# Altium PCB ThrusterBoardOld.PcbDoc
Units mil, origin at the board's own origin, x right, y up, seen from the top; angles counter-clockwise.
Board outline 6500 x 2830 mil, 2 copper layers (Top Layer, Bottom Layer); 54 components, 65 nets, 277 pads, 83 vias.
Unrouted connection lines stored in the file: 8.
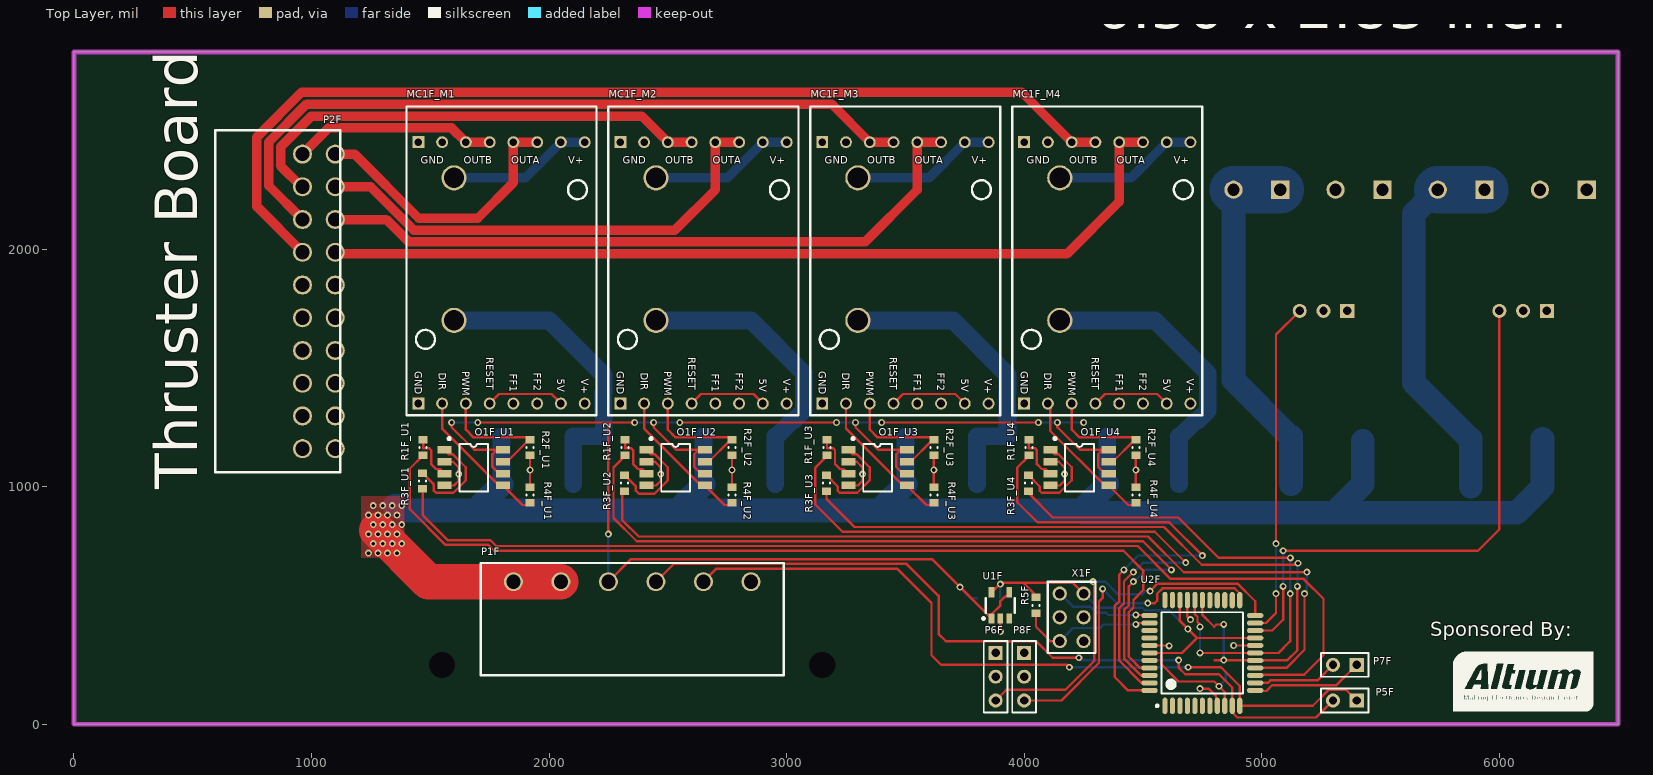
[diagram p0: Top Layer view]
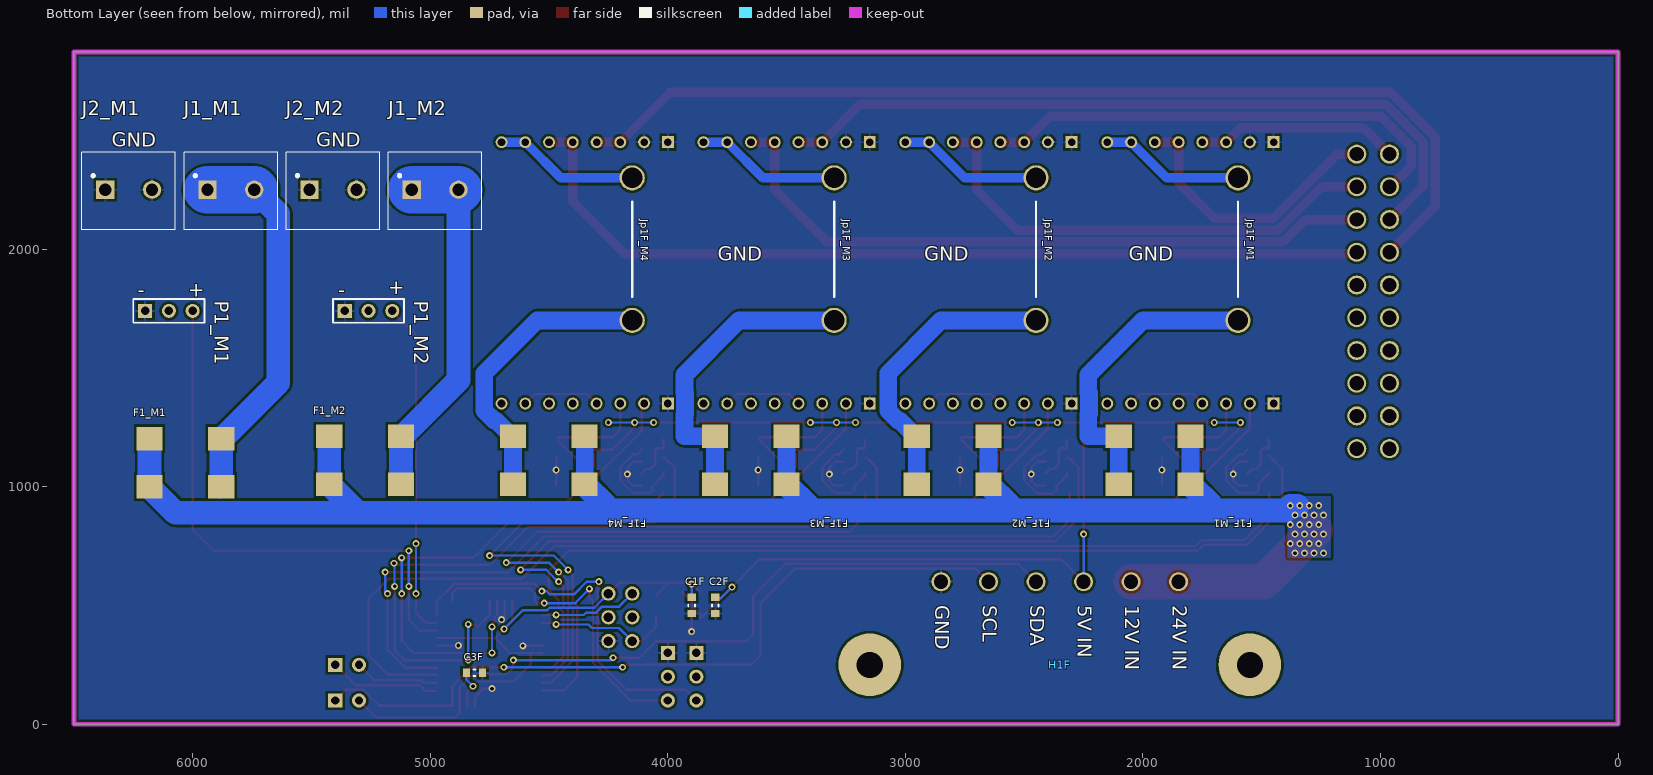
[diagram p1: Bottom Layer view, seen from below]

## Layer stack, top to bottom
Top Solder: solder mask 0.4, Solder Resist, Dk 3.5
Top Layer: signal copper 1.4
Dielectric 1: dielectric 12.6, FR-4, Dk 4.8
Bottom Layer: signal copper 1.4
Bottom Solder: solder mask 0.4, Solder Resist, Dk 3.5

## Board outline
0,0 6500,0 6500,2830 0,2830

## Design rules (kind name [scope] priority, off if disabled: settings)
Clearance [All] p1: gap=10 ignorepadtopadclearanceinfootprint=FALSE except(0: Arc-Hole Track-Hole SMDPad-Hole THPad-Hole Via-Hole Fill-Hole Poly-Hole Region-Hole Text-Hole; 7: SMDPad-SMDPad)
Height [All] p1: minheight=0 maxheight=5000 prefheight=500
HoleSize [All] p1: absolutevalues=TRUE maxlimit=110 minlimit=15 maxpercent=80.000 minpercent=20.000
MinimumAnnularRing Vias [IsVia] p1: minimumring=5
MinimumAnnularRing [All] p2: minimumring=7
MinimumSolderMaskSliver [All] p1: minsoldermaskwidth=0
PolygonConnect "Ignore GND Vias" [InNet('GND') AND IsVia] p1: connectstyle=Direct reliefconductorwidth=10 reliefentries=4 polygonreliefangle="90 Angle" airgapwidth=10
PolygonConnect ViaStitch [InNet('24V') vs InNet('24V')] p2: connectstyle=Direct reliefconductorwidth=10 reliefentries=4 polygonreliefangle="90 Angle" airgapwidth=10
PolygonConnect [All] p3: connectstyle=Relief reliefconductorwidth=10 reliefentries=4 polygonreliefangle="90 Angle" airgapwidth=10
RoomDefinition M2 [InComponentClass('M2')] p1: confinementstyle=ConfineIn formatcopy=TRUE lockcomponents=FALSE outline -1000,-1000 1000,-1000 1000,0 -1000,0
RoomDefinition M1 [InComponentClass('M1')] p2: confinementstyle=ConfineIn formatcopy=TRUE lockcomponents=FALSE outline -1000,-1000 1000,-1000 1000,0 -1000,0
RoomDefinition M_1 [InComponentClass('M2')] p3: confinementstyle=ConfineIn formatcopy=TRUE lockcomponents=FALSE outline -1000,-1000 1000,-1000 1000,0 -1000,0
RoomDefinition M_2 [InComponentClass('M1')] p4: confinementstyle=ConfineIn formatcopy=TRUE lockcomponents=FALSE outline -1000,-1000 1000,-1000 1000,0 -1000,0
RoomDefinition "Motor Control" [InComponentClass('Motor Control')] p5: confinementstyle=ConfineIn formatcopy=TRUE lockcomponents=FALSE outline -1000,-1000 1000,-1000 1000,0 -1000,0
RoomDefinition "Thruster Board" [InComponentClass('Thruster Board')] p6 off: confinementstyle=ConfineIn formatcopy=TRUE lockcomponents=FALSE outline 1270,700 1270,30 3250,30 3250,700
RoomDefinition U1 [InComponentClass('U1')] p7 off: confinementstyle=ConfineIn formatcopy=TRUE lockcomponents=FALSE outline 1400,1245 1400,875 1970,875 1970,1245
RoomDefinition U2 [InComponentClass('U2')] p8 off: confinementstyle=ConfineIn formatcopy=TRUE lockcomponents=FALSE outline 2250,1245 2250,875 2820,875 2820,1245
RoomDefinition U3 [InComponentClass('U3')] p9 off: confinementstyle=ConfineIn formatcopy=TRUE lockcomponents=FALSE outline 3100,1245 3100,875 3670,875 3670,1245
RoomDefinition U4 [InComponentClass('U4')] p10 off: confinementstyle=ConfineIn formatcopy=TRUE lockcomponents=FALSE outline 3950,1245 3950,875 4520,875 4520,1245
RoomDefinition M3 [InComponentClass('M3')] p11 off: confinementstyle=ConfineIn formatcopy=TRUE lockcomponents=FALSE outline 3900,2700 3100,2700 3100,1200 3900,1200
RoomDefinition M4 [InComponentClass('M4')] p12 off: confinementstyle=ConfineIn formatcopy=TRUE lockcomponents=FALSE outline 4750,2700 3950,2700 3950,1200 4750,1200
RoomDefinition U_Microcontroller [InComponentClass('U_Microcontroller')] p13 off: confinementstyle=ConfineIn formatcopy=TRUE lockcomponents=FALSE outline 3550,-50 5490,-50 5490,830 3550,830
RoutingVias [All] p1: holewidth=28 width=50 viastyle="Through Hole" minholewidth=28 minwidth=50 maxholewidth=28 maxwidth=50
SilkToSilkClearance [All] p1: silktosilkclearance=7
SilkToSolderMaskClearance [IsPad] p1: minsilkscreentomaskgap=0 clearancetoexposedcopper=FALSE
SolderMaskExpansion ViaMaskExpansion [IsVia] p1: expansion=-50
SolderMaskExpansion [All] p2: expansion=4
Width [All] p1: maxlimit=200 minlimit=10 preferedwidth=10
25 further rules are at their usual default settings.

## Classes and differential pairs
channel class ESC: M1 M2
component class U3: O1F_U3 O3 R1F_U3 R2F_U3 R3F_U3 R4F_U3 R6 R11 R17
component class U_Microcontroller: C1F C2F C3F P5F P6F P7F P8F R5F U1F U2F X1F
net class ThrusterPower: 24V A1 A2 A3 A4 B1 B2 B3 B4 D1 D2 D3 D4 GND NetF1F_M1_2 NetF1F_M2_2 NetF1F_M3_2 NetF1F_M4_2 NetJp1F_M1_1 NetJp1F_M2_1 NetJp1F_M3_1 NetJp1F_M4_1 NetMC1F_M1_5V NetMC1F_M2_5V NetMC1F_M3_5V NetMC1F_M4_5V P1 P2 P3 P4
component class M1: F1F_M1 Jp1F_M1 MC1F_M1
component class M2: F1F_M2 Jp1F_M2 MC1F_M2
component class M3: F1F_M3 Jp1F_M3 MC1F_M3
component class M4: F1F_M4 Jp1F_M4 MC1F_M4
component class "Motor Control": P2F
component class U1: O1F_U1 R1F_U1 R2F_U1 R3F_U1 R4F_U1
component class U2: O1F_U2 R1F_U2 R2F_U2 R3F_U2 R4F_U2
component class U4: O1F_U4 R1F_U4 R2F_U4 R3F_U4 R4F_U4
net class A[1..6]: A1 A2 A3 A4
net class B[1..4]: B1 B2 B3 B4
net class D[1..4]: D1 D2 D3 D4
net class DIR[1..4]: DIR1 DIR2 DIR3 DIR4
net class P[1..4]: P1 P2 P3 P4
net class PWM[1..4]: PWM1 PWM2 PWM3 PWM4 PWM5 PWM6
channel class HBridges: M1 M2 M3 M4 M5 M6
channel class Optos: U1 U2 U3 U4 U5 U6
component class "Thruster Board": H1F P1F

## Components (designator, comment, footprint, x,y, rotation, side; value= is the part's Value field where it differs from the comment)
C1F "0.1uF, C0603, MultiComp" C0603 3900,500 r270 bottom value=0.1uF
C2F "0.1uF, C0603, MultiComp" C0603 3800,500 r270 bottom value=0.1uF
C3F "0.1uF, C0603, MultiComp" C0603 4814,216 r180 bottom value=0.1uF
F1_M1 "3569TR" "Horizontal SMD fuse clip" 6182,1202 r180 bottom (schematic designator F1)
F1_M2 "3569TR" "Horizontal SMD fuse clip" 5425,1212 r180 bottom (schematic designator F1)
F1F_M1 "3569TR" "Horizontal SMD fuse clip" 1800,1010 r0 bottom (schematic designator F1F)
F1F_M2 "3569TR" "Horizontal SMD fuse clip" 2650,1010 r0 bottom (schematic designator F1F)
F1F_M3 "3569TR" "Horizontal SMD fuse clip" 3500,1010 r0 bottom (schematic designator F1F)
F1F_M4 "3569TR" "Horizontal SMD fuse clip" 4350,1010 r0 bottom (schematic designator F1F)
H1F "Holes - x inch" "110mil Holes - 1.6 Inch" 2350,250 r0 top
J1_M1 "1935161" PHOENIX_1935161 5839.36,2250 r180 bottom (schematic designator J1)
J1_M2 "1935161" PHOENIX_1935161 4979.36,2250 r180 bottom (schematic designator J1)
J2_M1 "1935161" PHOENIX_1935161 6269.36,2250 r180 bottom (schematic designator J2)
J2_M2 "1935161" PHOENIX_1935161 5409.36,2250 r180 bottom (schematic designator J2)
Jp1F_M1 "Jumper" "Jumper, 12AWG, 0.6\"" 1600,2000 r90 bottom value=xxmil (schematic designator Jp1F)
Jp1F_M2 "Jumper" "Jumper, 12AWG, 0.6\"" 2450,2000 r90 bottom value=xxmil (schematic designator Jp1F)
Jp1F_M3 "Jumper" "Jumper, 12AWG, 0.6\"" 3300,2000 r90 bottom value=xxmil (schematic designator Jp1F)
Jp1F_M4 "Jumper" "Jumper, 12AWG, 0.6\"" 4150,2000 r90 bottom value=xxmil (schematic designator Jp1F)
MC1F_M1 "Motor Controller" "POLOLU 24V12" 1800,1900 r270 top (schematic designator MC1F)
MC1F_M2 "Motor Controller" "POLOLU 24V12" 2650,1900 r270 top (schematic designator MC1F)
MC1F_M3 "Motor Controller" "POLOLU 24V12" 3500,1900 r270 top (schematic designator MC1F)
MC1F_M4 "Motor Controller" "POLOLU 24V12" 4350,1900 r270 top (schematic designator MC1F)
O1F_U1 "LTV-208" "SSOP8 Lite-on" 1560,1155 r0 top (schematic designator O1F)
O1F_U2 "LTV-208" "SSOP8 Lite-on" 2410,1155 r0 top (schematic designator O1F)
O1F_U3 "LTV-208" "SSOP8 Lite-on" 3260,1155 r0 top (schematic designator O1F)
O1F_U4 "LTV-208" "SSOP8 Lite-on" 4110,1155 r0 top (schematic designator O1F)
P1_M1 "Header 3" HDR1X3 6200,1740 r180 bottom (schematic designator P1)
P1_M2 "Header 3" HDR1X3 5360,1740 r180 bottom (schematic designator P1)
P1F "MSTBA 2,5/ 6-G-5,08" "MSTBA 2,5 6-G-5,08" 1850,600 r0 top
P2F "MCDN 1,5/10-G1-3,5 P14THR" "MCDN 1,5/10-G1-3,5 P14THR w/ FMCD 1,5 9-ST-3,5" 1100,2400 r270 top
P5F "Header 2" HDR1X2 5400,100 r180 top
P6F "Header 3 - Female - Molex" "HDR1X3 - Female - Molex" 3880,300 r270 top
P7F "Header 2" HDR1X2 5400,250 r180 top
P8F "Header 3 - Female - Molex" "HDR1X3 - Female - Molex" 4000,300 r270 top
R1F_U1 "Resistor" R0603 1470,1165 r90 top value=330 (schematic designator R1F)
R1F_U2 "Resistor" R0603 2320,1165 r90 top value=330 (schematic designator R1F)
R1F_U3 "Resistor" R0603 3170,1165 r90 top value=330 (schematic designator R1F)
R1F_U4 "Resistor" R0603 4020,1165 r90 top value=330 (schematic designator R1F)
R2F_U1 "Resistor" R0603 1920,1165 r270 top value=820 (schematic designator R2F)
R2F_U2 "Resistor" R0603 2770,1165 r270 top value=820 (schematic designator R2F)
R2F_U3 "Resistor" R0603 3620,1165 r270 top value=820 (schematic designator R2F)
R2F_U4 "Resistor" R0603 4470,1165 r270 top value=820 (schematic designator R2F)
R3F_U1 "Resistor" R0603 1467.68,1023.86 r90 top value=330 (schematic designator R3F)
R3F_U2 "Resistor" R0603 2317.68,1015 r90 top value=330 (schematic designator R3F)
R3F_U3 "Resistor" R0603 3167.68,1015 r90 top value=330 (schematic designator R3F)
R3F_U4 "Resistor" R0603 4017.68,1015 r90 top value=330 (schematic designator R3F)
R4F_U1 "Resistor" R0603 1920,965 r90 top value=820 (schematic designator R4F)
R4F_U2 "Resistor" R0603 2770,965 r90 top value=820 (schematic designator R4F)
R4F_U3 "Resistor" R0603 3620,965 r90 top value=820 (schematic designator R4F)
R4F_U4 "Resistor" R0603 4470,965 r90 top value=820 (schematic designator R4F)
R5F "Resistor" R0603 4050,500 r90 top value=10K
U1F "MCP1804T-3302I/OT" MCP1804T-3302I/OT 3900,500 r0 top
U2F "ATxmega16D4-AU" 44A_N 4750,300 r90 top
X1F "Header" "2x3 Header" 4200,450 r270 top

## Footprints (in the part's own frame and the unit in brackets; to place one, negate y for a bottom-side part, rotate by r counter-clockwise, add the part's x,y. Pads: shape width x height; smd on the part's side, far side on the other; paste and mask are expansions set on the pad)
"2x3 Header" [mil]
  round 60 hole 40: 1(-100,-50) 2(-100,50) 3(0,-50) 4(0,50) 5(100,-50) 6(100,50)
  silkscreen extent -150,-100 150,100, body extent -150,-100 150,100, height 374
44A_N [mm] "Thin QFP, 44-Leads, Body 10x10mm, Pitch 0.8mm, IPC Medium Density"
  oval 1.75x0.55 smd: 1(-5.65,4) 2(-5.65,3.2) 3(-5.65,2.4) 4(-5.65,1.6) 5(-5.65,0.8) 6(-5.65,0) 7(-5.65,-0.8) 8(-5.65,-1.6) 9(-5.65,-2.4) 10(-5.65,-3.2) 11(-5.65,-4) 23(5.65,-4) 24(5.65,-3.2) 25(5.65,-2.4) 26(5.65,-1.6) 27(5.65,-0.8) 28(5.65,0) 29(5.65,0.8) 30(5.65,1.6) 31(5.65,2.4) 32(5.65,3.2) 33(5.65,4)
  oval 0.55x1.75 smd: 12(-4,-5.65) 13(-3.2,-5.65) 14(-2.4,-5.65) 15(-1.6,-5.65) 16(-0.8,-5.65) 17(0,-5.65) 18(0.8,-5.65) 19(1.6,-5.65) 20(2.4,-5.65) 21(3.2,-5.65) 22(4,-5.65) 34(4,5.65) 35(3.2,5.65) 36(2.4,5.65) 37(1.6,5.65) 38(0.8,5.65) 39(0,5.65) 40(-0.8,5.65) 41(-1.6,5.65) 42(-2.4,5.65) 43(-3.2,5.65) 44(-4,5.65)
  silkscreen extent -5.77,-4.35 4.35,4.95, body extent -5,-5 5,5, height 1.2
"110mil Holes - 1.6 Inch" [mil]
  round 0 hole 110: 0(-800,0) 0(800,0)
  round 264 smd far side mask+0: 0(-800,0) 0(800,0)
C0603 [mm] "Chip Capacitor, 2-Leads, Body 1.6x0.8mm, IPC Medium Density"
  rect 0.75x0.9 smd: 1(-0.875,0) 2(0.875,0)
  silkscreen extent -0.1,-0.35 0.1,0.35, body extent -0.8,-0.4 0.8,0.4, height 0.6
HDR1X2 [mm] "Connector; Header; 2 Position"
  rect 1.5x1.5 hole 0.9: 1(0,0)
  round 1.5 hole 0.9: 2(2.54,0)
  silkscreen extent -1.27,-1.27 3.81,1.27
HDR1X3 [mm] "Connector; Header; 3 Position"
  rect 1.5x1.5 hole 0.9: 1(0,0)
  round 1.5 hole 0.9: 2(2.54,0) 3(5.08,0)
  silkscreen extent -1.27,-1.27 6.35,1.27
"HDR1X3 - Female - Molex" [mm] "Connector; Header; 3 Position"
  rect 1.5x1.5 hole 0.9: 1(0,0)
  round 1.5 hole 0.9: 2(2.54,0) 3(5.08,0)
  silkscreen extent -1.27,-1.27 6.35,1.27, body extent -1.27,-1.27 6.35,1.27, height 8.55
"Horizontal SMD fuse clip" [mil] "Fuse clip assembly for automotive fuses"
  rect 110x100 smd: 1(0,-202) 1(0,0) 2(302,-202) 2(302,0)
  body extent -78,-611 380,53, height 150
"Jumper, 12AWG, 0.6\"" [mil]
  round 105.8 hole 85.8: 1(-300,0) 2(300,0)
  silkscreen extent -200,0 200,0
"MCDN 1,5/10-G1-3,5 P14THR w/ FMCD 1,5 9-ST-3,5" [mm] "Header, Male, Dual Row, 9 Position, Horizontal w/ FMCD 1,5 9-ST-3,5"
  round 2.035 hole 1.527: 1(0,0) 2(0,-3.5) 3(3.5,0) 4(3.5,-3.5) 5(7,0) 6(7,-3.5) 7(10.5,0) 8(10.5,-3.5) 9(14,0) 10(14,-3.5) 11(17.5,0) 12(17.5,-3.5) 13(21,0) 14(21,-3.5) 15(24.5,0) 16(24.5,-3.5) 17(28,0) 18(28,-3.5) 19(31.5,0) 20(31.5,-3.5)
  silkscreen extent -2.55,-12.83 34.02,0.53, body extent -2.42,-29.47 33.97,0.6, height 16.09
MCP1804T-3302I/OT [mm] "SOT-23"
  rect 0.6x1.1 smd: NC(0.95,-1.4) SHDN(0.95,1.4) Vin(-0.95,-1.4) Vout(-0.95,1.4) Vss(0,-1.4)
  silkscreen extent -1.8,-1.4 1.55,0.8, body extent -1.5,-1.63 1.5,1.58, height 0.92
"MSTBA 2,5 6-G-5,08" [mm] "Header, Male, 6 Pin, 90deg"
  round 2.03 hole 1.53: 1(0,0) 2(5.08,0) 3(10.16,0) 4(15.24,0) 5(20.32,0) 6(25.4,0)
  silkscreen extent -3.5,-10 28.9,2, body extent -3.52,-10 28.95,2, height 8.6
PHOENIX_1935161 [mm]
  rect 1.95x1.95 hole 1.3: 1(-2.5,0)
  round 1.95 hole 1.3: 2(2.5,0)
  silkscreen extent -5,-4.3 5,4
"POLOLU 24V12" [mil] "Pololu 24v12 Motor Driver"
  round 50 hole 32: 5V(550,250) DIR(550,-250) FF1(550,50) FF2(550,150) GND(-550,-250) OUTA(-550,50) OUTA(-550,150) OUTB(-550,-150) OUTB(-550,-50) PWM(550,-150) RESET(550,-50) V+(-550,350) V+(-550,250) V+_SENSE(550,350)
  rect 50x50 hole 32: GND(-550,-350) GND(550,-350)
  silkscreen extent -700,-400 600,400, body extent -700,-400 600,400, height 906
R0603 [mm] "Chip Resistor, 2-Leads, Body 1.5x0.8mm, IPC Medium Density"
  rect 0.8x0.95 smd: 1(-0.85,0) 2(0.85,0)
  silkscreen extent -0.05,-0.38 0.05,0.38, body extent -0.77,-0.4 0.77,0.4, height 0.45
"SSOP8 Lite-on" [mm]
  rect 1.5x0.8 smd: 1(0,0) 2(0,-1.27) 3(0,-2.54) 4(0,-3.81) 5(6.25,-3.81) 6(6.25,-2.54) 7(6.25,-1.27) 8(6.25,0)
  silkscreen extent 0.36,-4.44 4.67,1.34, body extent 0.02,-4.4 6.18,0.6, height 2

## Part data
C1F C2F C3F: "Ceramic MLCC, Multicompo, X7R Dielectric", Capacitance="0.1 F", Capacitance Tolerance=10%, Ceramic Capacitor Case="0603 [1608 Metric]", Dielectric Characteristic=X7, Manufacturer 1=MULTICOMP, Manufacturer Part Number=MC0603B104K500CT, Supplier Part Number 1=06R4927, Voltage Rating=50, ComponentLink1Description=http://www.farnell.com/datasheets/1522998.pdf, ComponentLink1URL=http://www.farnell.com/datasheets/1522998.pdf, ComponentLink2Description=/pdfs/datasheets/spc/Ta-1098.pdf, ComponentLink2URL=/pdfs/datasheets/spc/Ta-1098.pdf, Description 1="MULTICOMP - MC0603B104K500CT - CERAMIC CAPACITOR, 0.1UF, 50V, X7R, 10%, 0603", Packaging="Cut Tape", Pricing 1="1=0.075, 10=0.048, 50=0.027, 100=0.021, 250=0.017, 500=0.015, 1000=0.012 (USD)", Product Range="MC Series", RoHS=YES, Stock 1=166516, Supplier 1=Newark
F1_M1 F1_M2 F1F_M1 F1F_M2 F1F_M3 F1F_M4: "Fuse Clip Assembly", Manufacturer 1=KEYSTONE, Supplier Part Number 1=24T5056, ComponentLink1Description=http://www.farnell.com/datasheets/1703973.pdf, ComponentLink1URL=http://www.farnell.com/datasheets/1703973.pdf, Description 1="KEYSTONE - 3569TR - FUSE CLIP, AUTO BLADE, SMT", Manufacturer Part Number=3569TR, Pricing 1="1=0.798, 50=0.672, 100=0.644, 250=0.589, 500=0.566, 1000=0.491, 2500=0.427, 5000=0.413 (USD)", RoHS=YES, Stock 1=1000, Subassembly=Yes, Supplier 1=Newark
J1_M1 J1_M2 J2_M1 J2_M2: "Conn Terminal Blocks 2 POS 5mm Solder ST Thru-Hole 16A", Package=None, Availability=Unavailable, MF="Phoenix Contact", MP=1935161, Price=None, SnapEDA_Link=https://www.snapeda.com/parts/1935161/Phoenix%20Contact/view-part/?ref=snap
Jp1F_M1 Jp1F_M2 Jp1F_M3 Jp1F_M4: library part Jump, "Resistor"
MC1F_M1 MC1F_M2 MC1F_M3 MC1F_M4: library part "Pololu 24v12", "Pololu 24v12 Motor Driver", Supplier Part Number 1=24v12, Supplier 1=Pololu
O1F_U1 O1F_U2 O1F_U3 O1F_U4: library part "LTV-208, 3.75KV", "2 Channel Optoisolator", Current - DC Forward (If) (Max)=30mA, Current - Output / Channel=-, Current Transfer Ratio (Max)="320% @ 10mA", Current Transfer Ratio (Min)="160% @ 10mA", Manufacturer 1="Lite-On Inc.", Operating Temperature="-55°C ~ 110°C", Package / Case="8-SOIC (0.154\", 3.90mm Width)", Supplier Device Package=8-SOP, Supplier Part Number 1=160-2067-1-ND, Voltage - Forward (Vf) (Typ)=1.2V, Voltage - Isolation=3750Vrms, Voltage - Output (Max)=80V, Category=Isolators, ComponentLink1Description=http://media.digikey.com/pdf/Data%20Sheets/Lite-On%20PDFs/LTV-20x.pdf, ComponentLink1URL=http://media.digikey.com/pdf/Data%20Sheets/Lite-On%20PDFs/LTV-20x.pdf, Description 1="OPTOISO 3.75KV 2CH TRANS 8-SOP", Input Type=DC, Manufacturer Part Number=LTV-208, Mounting Type="Surface Mount", Number of Channels=2, Output Type=Transistor, Packaging="Cut Tape (CT)", Pricing 1="1=1.24, 10=0.99, 100=0.6875, 250=0.605, 500=0.50876, 1000=0.44 (USD)", Rise / Fall Time (Typ)=-, RoHS="RoHS Compliant", Stock 1=1743, Supplier 1=Digi-Key, Turn On / Turn Off Time (Typ)="5µs, 4µs", Vce Saturation (Max)=400mV
P1_M1 P1_M2: "Header, 3-Pin", LatestRevisionDate=17-Jul-2002, LatestRevisionNote="Re-released for DXP Platform.", Publisher="Altium Limited"
P1F: "Header, 6-Pin", Color=Gray, Current Rating="12 A", Flammability Rating="UL 94 V-0", Manufacturer 1="Phoenix Contact", Manufacturer Part Number=1757284, Supplier Part Number 1=651-1757284, Voltage Rating="250 V", Brand="Phoenix Contact", Category="Pluggable Terminal Blocks", ComponentLink1Description=http://www.phoenixcontact.com/us/products/1757284/pdf, ComponentLink1URL=http://www.phoenixcontact.com/us/products/1757284/pdf, Contact Plating=Tin, Description 1="Pluggable Terminal Blocks 6 Pos 5.08mm pitch Through Hole Header", Housing Material="Polybutylene Terephthalate (PBT)", Minimum Order Quantity=1, Number of Positions="6 Position", Packaging=Bulk, Pitch="5.08 mm", Pricing 1="1=2.64, 10=2.56, 25=2.51, 50=2.50, 100=2.34, 200=2.14, 500=1.98, 1000=1.89, 2000=1.76 (AUD)", Product=Headers, Product Category="Pluggable Standard Terminal Blocks", Reeling=False, RoHS="RoHS Compliant", RoHS - Mouser=Y, Series=MSTBA, Standard Pack Qty=50, Stock 1=1398, Supplier 1=Mouser, Termination Style="Through Hole", Tradename="COMBICON Control"
P2F: "Header, 20-Pin"
P5F P7F: "Header, 2-Pin", LatestRevisionDate=17-Jul-2002, LatestRevisionNote="Re-released for DXP Platform.", Publisher="Altium Limited"
P6F P8F: "Header, 3-Pin", Current Rating="3 A", Manufacturer=Molex, Manufacturer Part Number=90147-1103, Supplier Part Number 1=538-90147-1103, Voltage Rating="350 V", Accessory Type=-, Brand=Molex, Category="Headers & Wire Housings", ComponentLink1Description=http://www.mouser.com/ds/2/276/0901471103_PCB_RECEPTACLES-176816.pdf, ComponentLink1URL=http://www.mouser.com/ds/2/276/0901471103_PCB_RECEPTACLES-176816.pdf, Contact Gender="Socket (Female)", Contact Material="Phosphor Bronze", Contact Plating=Tin, Contact Type=-, Housing Gender=-, Housing Material=Polyester, Minimum Order Quantity=1, Mounting Angle=Vertical, Mounting Style="Through Hole", Number of Positions="3 Position", Number of Rows="1 Row", Packaging=Tube, Pitch="2.54 mm", Pricing 1="1=1.26, 100=1.09, 500=0.988, 1000=0.895, 2000=0.734, 5000=0.575, 10000=0.490 (AUD)", Product=Headers, Product Category="C-Grid Connectors", Reeling=False, RoHS="RoHS Compliant", RoHS - Mouser=Y, Row Spacing=-, Series=90147, Standard Pack Qty=5760, Stock 1=5207, Supplier 1=Mouser, Termination Style="Through Hole", Tradename=C-Grid, Type=Socket
R1F_U1 R1F_U2 R1F_U3 R1F_U4 R3F_U1 R3F_U2 R3F_U3 R3F_U4: library part "330, 5%, 100mW, Yageo, R0603", Manufacturer 1=YAGEO, Manufacturer Part Number=RC0603JR-07330RL, Power Rating=100, Resistance=330, Resistance Tolerance=5%, Resistor Case Style="0603 [1608 Metric]", Supplier Part Number 1=68R0184, Tolerance=1%, Voltage Rating=50, Body Width=0.8, ComponentLink1Description=http://past.yageo.com/pdf/PYu-R_Packing_6.pdf, ComponentLink1URL=http://past.yageo.com/pdf/PYu-R_Packing_6.pdf, ComponentLink2Description=http://www.farnell.com/cad/1538940.zip, ComponentLink2URL=http://www.farnell.com/cad/1538940.zip, ComponentLink3Description=http://www.farnell.com/datasheets/1868787.pdf, ComponentLink3URL=http://www.farnell.com/datasheets/1868787.pdf, ComponentLink4Description=http://www.yageo.com/pdf/PYu-RC0603_51_RoHS_L_4.pdf, ComponentLink4URL=http://www.yageo.com/pdf/PYu-RC0603_51_RoHS_L_4.pdf, Description 1="YAGEO - RC0603JR-07330RL - RES, THICK FILM, 330R, 5%, 0.1W, 0603", MSL=-, Packaging="Cut Tape", Pricing 1="1=0.002, 10=0.002, 25=0.002, 100=0.002, 250=0.002, 1000=0.002 (USD)", Product Range="RC Series", RoHS=YESX, Stock 1=4027, Supplier 1=Newark
R2F_U1 R2F_U2 R2F_U3 R2F_U4 R4F_U1 R4F_U2 R4F_U3 R4F_U4: library part "820, 5%, 100mW, Yageo, R0603", Manufacturer 1=YAGEO, Manufacturer Part Number=RC0603JR-07820RL, Power Rating=100, Resistance=820, Resistance Tolerance=5%, Resistor Case Style="0603 [1608 Metric]", Supplier Part Number 1=68R0212, Tolerance=1%, Voltage Rating=50, Body Width=0.8, ComponentLink1Description=http://past.yageo.com/pdf/PYu-R_Packing_6.pdf, ComponentLink1URL=http://past.yageo.com/pdf/PYu-R_Packing_6.pdf, ComponentLink2Description=http://www.farnell.com/cad/1539003.zip, ComponentLink2URL=http://www.farnell.com/cad/1539003.zip, ComponentLink3Description=http://www.farnell.com/datasheets/1868787.pdf, ComponentLink3URL=http://www.farnell.com/datasheets/1868787.pdf, ComponentLink4Description=http://www.yageo.com/pdf/PYu-RC0603_51_RoHS_L_4.pdf, ComponentLink4URL=http://www.yageo.com/pdf/PYu-RC0603_51_RoHS_L_4.pdf, Description 1="YAGEO - RC0603JR-07820RL - RES, THICK FILM, 820R, 5%, 0.1W, 0603", MSL=-, Packaging="Cut Tape", Pricing 1="1=0.001, 10=0.001, 25=0.001, 100=0.001, 250=0.001, 1000=0.001 (USD)", Product Range="RC Series", RoHS=YESX, Stock 1=17122, Supplier 1=Newark
R5F: library part "10k, 1%, 100mW, Yageo, R0603", Manufacturer 1=YAGEO, Manufacturer Part Number=RC0603FR-1010KL, Power Rating=100, Resistance=10, Resistance Tolerance=1%, Resistor Case Style="0603 [1608 Metric]", Supplier Part Number 1=68R0120, Voltage Rating=50, Body Length=1.6, ComponentLink1Description=http://www.farnell.com/datasheets/1868787.pdf, ComponentLink1URL=http://www.farnell.com/datasheets/1868787.pdf, ComponentLink2Description=http://www.yageo.com/pdf/PYu-RC0603_51_RoHS_L_4.pdf, ComponentLink2URL=http://www.yageo.com/pdf/PYu-RC0603_51_RoHS_L_4.pdf, Description 1="YAGEO - RC0603FR-1010KL - RES, THICK FILM, 10K, 1%, 0.1W, 0603", MSL=-, Packaging="Cut Tape", Pricing 1="1=0.002, 10=0.002, 25=0.002, 100=0.002, 250=0.002, 1000=0.002 (USD)", Product Range="RC Series", RoHS=YESX, Stock 1=7839, Supplier 1=Newark, Tolerance=1%
U1F: "3.3V Linear Regulator", Dropout Voltage Vdo=260, Input Voltage Max=28, Input Voltage Min=2, LDO Regulator Case Style=SOT-23, Manufacturer 1=MICROCHIP, Operating Temperature Min="-40 C", Output Current=150, Supplier Part Number 1=55R1047, ComponentLink1Description=http://www.farnell.com/datasheets/1789199.pdf, ComponentLink1URL=http://www.farnell.com/datasheets/1789199.pdf, ComponentLink2Description=http://www.farnell.com/cad/1790647.zip, ComponentLink2URL=http://www.farnell.com/cad/1790647.zip, Description 1="MICROCHIP - MCP1804T-3302I/OT - LDO VOLTAGE REGULATOR, 3.3V, 150mA, 5-SOT-23", Manufacturer Part Number=MCP1804T-3302I/OT, No. of Pins=5, Pricing 1="1=0.67, 26=0.56, 100=0.51 (USD)", RoHS=YES, Stock 1=12, Supplier 1=Newark, URL=http://www.newark.com/microchip/mcp1804t-3302i-ot/ldo-voltage-regulator-3-3v-150ma/dp/55R1047
U2F: "8/16-bit AVR XMEGA D4 Microcontroller, 1.6-3.6V, 32MHz, 16KB + 4KB Flash, 1KB EEPROM, 2KB SRAM, 44-pin TQFP, Industrial Grade (-40°C to 85°C), Pb-Free", Manufacturer 1=ATMEL, Manufacturer Part Number=ATXMEGA16D4-AU, MCU Case Style=TQFP, Supplier Part Number 1=68T3906, Supply Voltage Min=1.6, Code_JEDEC=MS-026-ACB, ComponentLink1Description="Manufacturer URL", ComponentLink1URL=http://www.atmel.com/, ComponentLink2Description="ATxmega128D4/64D4/32D4/16D4 Datasheet", ComponentLink2URL=http://www.atmel.com/dyn/resources/prod_documents/doc8135.pdf, ComponentLink3Description=http://www.farnell.com/datasheets/1693882.pdf, ComponentLink3URL=http://www.farnell.com/datasheets/1693882.pdf, ComponentLink4Description=http://www.farnell.com/cad/1773743.zip, ComponentLink4URL=http://www.farnell.com/cad/1773743.zip, ComponentLink5Description=http://bcove.me/gu8hm7kh, ComponentLink5URL=http://bcove.me/gu8hm7kh, Controller Family/Series=ATxmega, CPU Speed=32, DatasheetVersion="revJ, Dec-2010", Description 1="ATMEL - ATXMEGA16D4-AU - MICROCONTROLLER MCU, 8 BIT, AVR XMEGA, 32MHZ, TQFP-44", No. of I/O's=34, No. of Pins=44, PackageDescription="44-Pin Plastic Thin Profile Quad Flat Pack, 10 x 10 x 1.0 mm Body, 0.8 mm Pitch (TQFP)", PackageReference=44A, PackageVersion="revC, Oct-2010", Pricing 1="1=2.71, 10=2.38, 25=2.24, 50=1.9, 100=1.79, 250=1.72, 500=1.69, 1000=1.49 (USD)", Program Memory Size=16, RAM Memory Size=2, RoHS=YES, Stock 1=196, Supplier 1=Newark
X1F: library part "2x3 Header", "2x3 Header", Manufacturer 1=FCI, Manufacturer Part Number=67996-406HLF, Supplier Part Number 1=20M2191, ComponentLink1Description=http://www.farnell.com/datasheets/1876884.pdf, ComponentLink1URL=http://www.farnell.com/datasheets/1876884.pdf, Contact Plating="Tin Plated Contacts", Contact Termination Type="Through Hole", Description 1="FCI - 67996-406HLF - BOARD-BOARD CONNECTOR HEADER, 6 POSITION, 2ROW", Gender=Header, No. of Contacts=6, No. of Rows=2, Pitch Spacing=2.54, Pricing 1="1=0.254, 10=0.218, 25=0.186, 50=0.178, 100=0.16, 250=0.153, 500=0.128, 1000=0.117 (USD)", Product Range="BergStik 67996 Series", RoHS=YES, Stock 1=441, Supplier 1=Newark

## Via types
v1: diameter 29, hole 15, Top Layer to Bottom Layer, 83 vias

## Nets (pads, with @x,y where several pads share a name; then routed paths per layer and width w, separated by ;. In a path a pad name is that pad's centre, name@x,y a point inside that pad or via, vN(x,y) a via of type N, cw(c..) or ccw(c..) an arc to the next point about the centre after c; other vN are vias at no path point)
3V3: C1F.1 C3F.1 R5F.2 U1F.Vout U2F.9 U2F.19 U2F.31 U2F.39 X1F.2 | length 2213.7
  Top Layer w10: U1F.Vout 3902.48,595 4205,595 X1F.2 ; 3998.66,593.66 R5F.2@4050,542.32 ; U2F.39@4533.23,294.33 U2F.39 4577.01,300 ; U2F.31 4655.51,434.49 v1(4689.3,400.7) 4727.01,362.99 ; U2F.9 4844.49,135.51 v1(4820,160) 4800,180 4650,180 4577.01,252.99 4577.01,300 ; U2F.19 4943.79,362.99 4727.01,362.99 ; 4577.01,300 4664.01,300 4727.01,362.99
  Bottom Layer w10: C1F.1@3900,529.53 C1F.1 v1(3900,590) ; X1F.2 4310,490 4498.28,490 4507.78,480.5 4609.5,480.5 v1(4689.3,400.7) ; v1(4820,160) 4848.45,188.45 C3F.1
5V: C2F.1 O1F_U1.6 O1F_U1.8 O1F_U2.6 O1F_U2.8 O1F_U3.6 O1F_U3.8 O1F_U4.6 O1F_U4.8 P1F.3 U1F.SHDN U1F.Vin | length 6962.1
  Top Layer w10: v1(1590,1270) 1590,1250 1685,1155 O1F_U1.8@1780,1155 ; v1(1700,1270) 2250,1270 ; O1F_U1.6 1789.57,1055 1761.54,1083.04 1761.54,1136.54 O1F_U1.8@1780,1155 ; O1F_U1.8 O1F_U1.8@1780,1155 ; P1F.3 2344.96,694.96 3612.52,694.96 v1(3730,577.48) U1F.Vin 3862.6,462.6 3900,500 3900,517.72 3917.4,535.12 3918.87,535.12 3937.4,553.64 U1F.SHDN ; v1(2250,800) 2250,1270 ; v1(2360,1270) 2250,1270 ; v1(2440,1270) 2440,1250 2535,1155 O1F_U2.8@2630,1155 ; v1(2550,1270) v1(3210,1270) ; O1F_U2.6 2639.57,1055 2611.54,1083.04 2611.54,1136.54 O1F_U2.8@2630,1155 ; O1F_U2.8 O1F_U2.8@2630,1155 ; v1(3290,1270) 3290,1250 3385,1155 O1F_U3.8@3480,1155 ; v1(3400,1270) v1(4060,1270) ; O1F_U3.6 3489.57,1055 3461.54,1083.04 3461.54,1136.54 O1F_U3.8@3480,1155 ; O1F_U3.8 O1F_U3.8@3480,1155 ; v1(4140,1270) 4140,1250 4235,1155 O1F_U4.8@4330,1155 ; O1F_U4.6 4339.57,1055 4311.54,1083.04 4311.54,1136.54 O1F_U4.8@4330,1155 ; O1F_U4.8 O1F_U4.8@4330,1155
  Bottom Layer w10: v1(1590,1270) v1(1700,1270) ; P1F.3 v1(2250,800) ; v1(2360,1270) v1(2440,1270) v1(2550,1270) ; v1(3210,1270) v1(3290,1270) v1(3400,1270) ; v1(3730,577.48) 3777.95,529.53 C2F.1@3800,529.53 ; v1(4060,1270) v1(4140,1270) v1(4250,1270)
24V: F1_M1.1 F1_M2.1 F1F_M1.1 F1F_M2.1 F1F_M3.1 F1F_M4.1 P1F.1 P1F.2 | length 7630.1
  Top Layer w150: 1276.04,816.04 1492.07,600 P1F.1 P1F.2
  Bottom Layer w40: 4240,900 4250,890
  Bottom Layer w75: F1F_M1.1@1800,1010 F1F_M1.1@1800,1212 ; F1F_M2.1@2650,1010 F1F_M2.1@2650,1212 ; F1F_M3.1@3500,1010 F1F_M3.1@3500,1212 ; F1F_M4.1@4350,1010 F1F_M4.1@4350,1212
  Bottom Layer w100: v1@1350,920 v1(1380,920) 1400,900 1710,900 2560,900 3410,900 4240,900 ; 1710,920 F1F_M1.1@1800,1010 ; 2560,920 F1F_M2.1@2650,1010 ; 3410,920 F1F_M3.1@3500,1010 ; 4250,890 5305,890 ; 4260,920 F1F_M4.1@4350,1010 ; F1_M2.1@5425,1192 5425,1010 5420,1010 5420,1005 5305,890 ; F1_M1.1@6182,1202 6182,1000 6177,1000 6177,995 6072,890 5305,890
  other v1: 1240,720 1280,720 1320,720 1360,720 1260,760 1300,760 1340,760 1380,760 1240,800 1280,800 1320,800 1360,800 1260,840 1300,840 1340,840 1380,840 1240,880 1280,880 1320,880 1360,880 1260,920 1300,920 1340,920
A1: MC1F_M1.OUTA P2F.1 | length 1194
  Top Layer w40: P2F.1 1181.42,2400 1451.42,2130 1700,2130 1850,2280 1850,2450 MC1F_M1.OUTA@1950,2450
A2: MC1F_M2.OUTA P2F.3 | length 2045.9
  Top Layer w40: P2F.3 1248.51,2262.2 1430.71,2080 2530,2080 2700,2250 2700,2450 MC1F_M2.OUTA@2800,2450
A3: MC1F_M3.OUTA P2F.5 | length 2880.2
  Top Layer w40: P2F.5 1315.59,2124.41 1410,2030 3330,2030 3550,2250 3550,2450 MC1F_M3.OUTA@3650,2450
A4: MC1F_M4.OUTA P2F.7 | length 3743.9
  Top Layer w40: P2F.7 1106.61,1980 4180,1980 4400,2200 4400,2450 MC1F_M4.OUTA@4500,2450
B1: MC1F_M1.OUTB P2F.2 | length 858.2
  Top Layer w40: P2F.2 1072.2,2510 1590,2510 1650,2450 MC1F_M1.OUTB@1750,2450
B2: MC1F_M2.OUTB P2F.4 | length 2038
  Top Layer w40: P2F.4 957.8,2262.2 870,2350 870,2430 1000,2560 2390,2560 2500,2450 MC1F_M2.OUTB@2600,2450
B3: MC1F_M3.OUTB P2F.6 | length 3147.5
  Top Layer w40: P2F.6 820,2266.61 820,2450.71 979.29,2610 3190,2610 3350,2450 MC1F_M3.OUTB@3450,2450
B4: MC1F_M4.OUTB P2F.8 | length 4259.5
  Top Layer w40: P2F.8 770,2178.82 770,2471.42 958.58,2660 3990,2660 4200,2450 MC1F_M4.OUTB@4300,2450
BLDC1: P6F.3 U2F.22 | length 1660.3
  Top Layer w10: P6F.3@3900,100 3900,89.06 3884.53,104.53 3924.53,144.53 4172.81,144.53 4295,266.72 4295,595 v1(4290,600) ; v1(4530,560) 4561.89,591.89 4898.18,591.89 4972.44,517.63 U2F.22
  Bottom Layer w10: v1(4290,600) 4341.72,600 4395.37,546.35 4496.35,546.35 4510,560 v1(4530,560)
BLDC2: P8F.3 U2F.23 | length 1386.6
  Top Layer w10: P8F.3 4156.57,100 4315,258.43 4315,516.42 4330,531.42 v1(4330,570) ; v1(4520,510) 4550,510 4559.5,519.5 4559.5,549.57 4581.82,571.89 4886.68,571.89 4907.48,551.09 U2F.23
  Bottom Layer w10: v1@4326.22,573.78 v1(4330,570) 4390,510 v1(4520,510)
D1: MC1F_M1.PWM O1F_U1.7 R2F_U1.1 | length 541.9
  Top Layer w10: MC1F_M1.PWM 1650,1240 1682.68,1207.32 1912.32,1207.32 1912.32,1194.77 1822.55,1105 O1F_U1.7
D2: MC1F_M2.PWM O1F_U2.7 R2F_U2.1 | length 541.9
  Top Layer w10: MC1F_M2.PWM 2500,1240 2532.68,1207.32 2762.32,1207.32 2762.32,1194.77 2672.55,1105 O1F_U2.7
D3: MC1F_M3.PWM O1F_U3.7 R2F_U3.1 | length 547.7
  Top Layer w10: MC1F_M3.PWM@3350,1355.86 MC1F_M3.PWM 3350,1240 3382.68,1207.32 3612.32,1207.32 3612.32,1194.77 3522.55,1105 O1F_U3.7
D4: MC1F_M4.PWM O1F_U4.7 R2F_U4.1 | length 541.9
  Top Layer w10: MC1F_M4.PWM 4200,1240 4232.68,1207.32 4462.32,1207.32 4462.32,1194.77 4372.55,1105 O1F_U4.7
DIR1: R1F_U1.1 U2F.41 | length 3937.1
  Top Layer w10: R1F_U1.1 1413.98,1075.51 1413.98,905.52 1564.5,755 1744.5,755 1769.5,730 4418,730 4500.5,647.5 4500.5,563.63 4460,523.13 4460,491.72 4440.5,472.22 4440.5,284.62 4488.11,237.01 U2F.41
DIR2: R1F_U2.1 U2F.42 | length 3374.8
  Top Layer w10: R1F_U2.1@2320,1122.68 2313.59,1122.68 2271.18,1080.27 2271.18,868.21 2369.39,770 4500,770 v1(4620,650) ; v1(4460,600) 4440,580 4440,500 4420.5,480.5 4420.5,276.33 4491.32,205.51 U2F.42
  Bottom Layer w10: v1(4460,600) 4461.72,600 4511.72,650 v1(4620,650)
DIR3: R1F_U3.1 U2F.43 | length 2681.6
  Top Layer w10: 3121.18,922.96 3121.18,1080.27 3163.59,1122.68 R1F_U3.1@3170,1122.68 ; 3122.96,922.96 3235.91,810 4550,810 v1(4680,680) ; v1(4460,640) 4458.28,640 4420,601.72 4420,508.29 4400.5,488.79 4400.5,268.05 4494.53,174.02 U2F.43
  Bottom Layer w10: v1(4460,640) 4499.5,679.5 4679.5,679.5 v1(4680,680)
DIR4: R1F_U4.1 U2F.44 | length 2076.2
  Top Layer w10: R1F_U4.1@4020,1122.68 4013.59,1122.68 3971.18,1080.27 3971.18,934.73 4055.91,850 4610,850 v1(4750,710) ; v1(4420,650) 4400,630 4400,516.57 4380.5,497.07 4380.5,199.5 4437.48,142.52 U2F.44
  Bottom Layer w10: v1(4420,650) 4480,710 v1(4750,710)
GND: C1F.2 C2F.2 C3F.2 J2_M1.1 J2_M1.2 J2_M2.1 J2_M2.2 MC1F_M1.GND MC1F_M2.GND MC1F_M3.GND MC1F_M4.GND O1F_U1.2 O1F_U1.4 O1F_U2.2 O1F_U2.4 O1F_U3.2 O1F_U3.4 O1F_U4.2 O1F_U4.4 P1_M1.1 P1_M2.1 P1F.6 P6F.1 P8F.1 R2F_U1.2 R2F_U2.2 R2F_U3.2 R2F_U4.2 R4F_U1.2 R4F_U2.2 R4F_U3.2 R4F_U4.2 U1F.Vss U2F.8 U2F.18 U2F.30 U2F.38 X1F.6 | length 1679.2
  Top Layer w10: O1F_U1.4 1600,1005 1620,1025 v1(1620,1052.68) 1620,1080.35 1595.35,1105 O1F_U1.2 ; R4F_U1.2@1920,1007.32 v1(1920,1070) R2F_U1.2@1920,1122.68 ; O1F_U2.4 2450,1005 2470,1025 v1(2470,1052.68) 2470,1080.35 2445.35,1105 O1F_U2.2 ; R4F_U2.2@2770,1007.32 v1(2770,1070) R2F_U2.2@2770,1122.68 ; O1F_U3.4 3300,1005 3320,1025 v1(3320,1052.68) 3320,1080.35 3295.35,1105 O1F_U3.2 ; R4F_U3.2@3620,1007.32 v1(3620,1070) R2F_U3.2@3620,1122.68 ; v1(3900,390) U1F.Vss ; O1F_U4.4 4150,1005 4170,1025 v1(4170,1052.68) 4170,1080.35 4145.35,1105 O1F_U4.2 ; R4F_U4.2@4470,1007.32 v1(4470,1070) R2F_U4.2@4470,1122.68 ; U2F.38 4608.5,331.5 v1(4610,330) ; U2F.30 4687.01,452.99 v1(4700,440) ; v1(4740,150) 4776.06,150 4807.32,118.74 4807.32,109.43 4809.82,106.94 4812.99,106.94 U2F.8 ; v1(4881.5,331.5) U2F.18
MISO: U2F.26
MOSI: U2F.25
NetF1_M1_2: F1_M1.2 J1_M1.1 J1_M1.2 | length 1596
  Bottom Layer w10: F1_M1.2@5875,1202 F1_M1.2@5880,1202 ; F1_M1.2@5880,1000 F1_M1.2@5885,1000
  Bottom Layer w100: J1_M1.2 5640,2149.07 5640,1437 5830,1247 F1_M1.2@5875,1202 ; F1_M1.2@5880,1000 F1_M1.2@5880,1202
  Bottom Layer w200: J1_M1.2 J1_M1.1
NetF1_M2_2: F1_M2.2 J1_M2.1 J1_M2.2 | length 1540
  Bottom Layer w10: F1_M2.2@5118,1212 F1_M2.2@5123,1212
  Bottom Layer w100: J1_M2.2 4880.93,1449.07 F1_M2.2@5118,1212 ; F1_M2.2@5123,1010 F1_M2.2@5123,1212
  Bottom Layer w200: J1_M2.2 J1_M2.1
NetF1F_M1_2: F1F_M1.2 | length 1944.5
  Bottom Layer w10: 1587.96,1712.04 1600,1700
  Bottom Layer w40: 1600,2300 1900,2300 2050,2450 2150,2450
  Bottom Layer w75: 1600,1700 2000,1700 2230,1470 2230,1397.18 2227.5,1394.68 2227.5,1305.32 2230,1302.82 2230,1212 2102,1212 F1F_M1.2@2102,1010
NetF1F_M2_2: F1F_M2.2 | length 1851.5
  Bottom Layer w40: 2450,2300 2750,2300 2900,2450 3000,2450
  Bottom Layer w75: 2450,1700 2850,1700 3072.5,1477.5 3072.5,1319.97 3030.03,1277.5 3022.5,1277.5 2957,1212 2952,1212 F1F_M2.2@2952,1010
NetF1F_M3_2: F1F_M3.2 | length 1944.5
  Bottom Layer w10: 3287.96,1712.04 3300,1700
  Bottom Layer w40: 3300,2300 3600,2300 3750,2450 3850,2450
  Bottom Layer w75: 3300,1700 3700,1700 3930,1470 3930,1397.18 3927.5,1394.68 3927.5,1305.32 3930,1302.82 3930,1212 3802,1212 F1F_M3.2@3802,1010
NetF1F_M4_2: F1F_M4.2 | length 1877.5
  Bottom Layer w10: 4131.67,1718.33 4150,1700
  Bottom Layer w40: 4150,2300 4450,2300 4600,2450 4700,2450
  Bottom Layer w75: 4150,1700 4550,1700 4772.5,1477.5 4772.5,1319.97 4730.03,1277.5 4722.5,1277.5 4657,1212 4652,1212 F1F_M4.2@4652,1010
NetJp1F_M1_1: Jp1F_M1.1 Jp1F_M1.2 MC1F_M1.V+
NetJp1F_M2_1: Jp1F_M2.1 Jp1F_M2.2 MC1F_M2.V+
NetJp1F_M3_1: Jp1F_M3.1 Jp1F_M3.2 MC1F_M3.V+
NetJp1F_M4_1: Jp1F_M4.1 Jp1F_M4.2 MC1F_M4.V+
NetMC1F_M1_5V: MC1F_M1.5V MC1F_M1.RESET | length 333.1
  Top Layer w10: MC1F_M1.RESET 1790,1390 2010,1390 MC1F_M1.5V
NetMC1F_M2_5V: MC1F_M2.5V MC1F_M2.RESET | length 333.1
  Top Layer w10: MC1F_M2.RESET 2640,1390 2860,1390 MC1F_M2.5V
NetMC1F_M3_5V: MC1F_M3.5V MC1F_M3.RESET | length 333.1
  Top Layer w10: MC1F_M3.RESET 3490,1390 3710,1390 MC1F_M3.5V
NetMC1F_M4_5V: MC1F_M4.5V MC1F_M4.RESET | length 333.1
  Top Layer w10: MC1F_M4.RESET 4340,1390 4560,1390 MC1F_M4.5V
NetO1F_U1_1: O1F_U1.1 R3F_U1.2 | length 434.1
  Top Layer w10: R3F_U1.2@1467.68,1062.68 R3F_U1.2 1515.47,1009.53 1515.47,983.04 1524.26,974.25 1597.54,974.25 1649.5,1026.22 1649.5,1081.99 1595.74,1135.75 1579.25,1135.75 O1F_U1.1
NetO1F_U1_3: O1F_U1.3 R1F_U1.2 | length 205
  Top Layer w10: R1F_U1.2 1470,1162.28 1494.91,1162.28 1503.7,1153.5 1503.7,1094.81 1524.26,1074.25 1540.75,1074.25 O1F_U1.3
NetO1F_U2_1: O1F_U2.1 R3F_U2.2 | length 426.7
  Top Layer w10: R3F_U2.2 2365.47,1000.67 2365.47,983.04 2378.51,970 2443.28,970 2499.5,1026.22 2499.5,1081.99 2445.74,1135.75 2429.25,1135.75 O1F_U2.1 ; R3F_U2.2@2317.68,1057.32 R3F_U2.2@2320,1055
NetO1F_U2_3: O1F_U2.3 R1F_U2.2 | length 205
  Top Layer w10: R1F_U2.2 2320,1162.28 2344.91,1162.28 2353.7,1153.5 2353.7,1094.81 2374.26,1074.25 2390.75,1074.25 O1F_U2.3
NetO1F_U3_1: O1F_U3.1 R3F_U3.2 | length 423.2
  Top Layer w10: R3F_U3.2 3215.47,1000.67 3215.47,983.04 3224.26,974.25 3297.54,974.25 3349.5,1026.22 3349.5,1081.99 3295.74,1135.75 3279.25,1135.75 O1F_U3.1 ; R3F_U3.2@3167.68,1057.32 R3F_U3.2@3170,1055
NetO1F_U3_3: O1F_U3.3 R1F_U3.2 | length 205
  Top Layer w10: R1F_U3.2 3170,1162.28 3194.91,1162.28 3203.7,1153.5 3203.7,1094.81 3224.26,1074.25 3240.75,1074.25 O1F_U3.3
NetO1F_U4_1: O1F_U4.1 R3F_U4.2 | length 423.6
  Top Layer w10: R3F_U4.2 4065.47,1000.67 4065.47,983.04 4074.26,974.25 4147.54,974.25 4200,1026.72 4200,1081.49 4145.74,1135.75 4129.25,1135.75 O1F_U4.1 ; R3F_U4.2@4017.68,1057.32 R3F_U4.2@4020,1055
NetO1F_U4_3: O1F_U4.3 R1F_U4.2 | length 205
  Top Layer w10: R1F_U4.2 4020,1162.28 4044.91,1162.28 4053.7,1153.5 4053.7,1094.81 4074.26,1074.25 4090.75,1074.25 O1F_U4.3
NetP7F_1: P7F.1 U2F.12 | length 470.6
  Top Layer w10: U2F.12@4974.96,140 5020,140 5044.53,164.53 5314.53,164.53 P7F.1
NetP7F_2: P7F.2 U2F.13 | length 359
  Top Layer w10: U2F.13 5025.73,174.02 5036.24,184.53 5234.53,184.53 P7F.2
NetU2F_1: U2F.1
NetU2F_2: U2F.2
NetU2F_34: U2F.34 X1F.1 | length 415.9
  Top Layer w10: v1(4470,460) 4525.04,460 U2F.34
  Bottom Layer w10: X1F.1 4205,495 4276.72,495 4301.72,470 4343.64,470 4353.64,460 v1(4470,460)
P1: MC1F_M1.DIR O1F_U1.5 R4F_U1.1 | length 608.8
  Top Layer w10: MC1F_M1.DIR 1550,1244.57 1789.57,1005 O1F_U1.5 1888.39,922.68 R4F_U1.1@1920,922.68
P2: MC1F_M2.DIR O1F_U2.5 R4F_U2.1 | length 608.8
  Top Layer w10: MC1F_M2.DIR 2400,1244.57 2639.57,1005 O1F_U2.5 2738.39,922.68 R4F_U2.1@2770,922.68
P3: MC1F_M3.DIR O1F_U3.5 R4F_U3.1 | length 608.8
  Top Layer w10: MC1F_M3.DIR 3250,1244.57 3489.57,1005 O1F_U3.5 3588.39,922.68 R4F_U3.1@3620,922.68
P4: MC1F_M4.DIR O1F_U4.5 R4F_U4.1 | length 608.8
  Top Layer w10: MC1F_M4.DIR 4110,1340 4110,1234.57 4339.57,1005 O1F_U4.5 4438.39,922.68 R4F_U4.1@4470,922.68
PWM1: R3F_U1.1 U2F.14 | length 4593.1
  Top Layer w10: 1467.68,972.68 1467.68,880.1 1572.78,775 1752.78,775 1777.78,750 4478.28,750 4616.39,611.89 5176.39,611.89 5260,528.28 5260,290 5178.28,208.28 4972.44,208.28 U2F.14
PWM2: R3F_U2.1 U2F.15 | length 3651.1
  Top Layer w10: R3F_U2.1@2307.68,967.68 2307.68,860 2377.68,790 4521.72,790 4671.72,640 v1(5190,640) ; U2F.15 5103.58,237.01 5180,313.43 v1(5180,550)
  Bottom Layer w10: v1(5180,550) 5190,560 v1(5190,640)
PWM3: R3F_U3.1 U2F.16 U2F.28 | length 3226.8
  Top Layer w10: R3F_U3.1@3167.68,972.68 3167.68,947.68 3285.35,830 4588.28,830 4747.28,671 5146.15,671 v1(5152.58,677.42) ; U2F.28 4750,460 4800,410 4810,420 v1(4840,420) ; v1(4840,270) 4802.99,270 4801.5,268.5 U2F.16 5106.79,268.5 5150,311.72 v1(5150,580)
  Bottom Layer w10: v1(4840,270) v1(4840,420) ; v1(5150,580) 5150.5,580.5 5150.5,675.35 v1(5152.58,677.42)
PWM4: R3F_U4.1 U2F.17 U2F.29 | length 2198.3
  Top Layer w10: R3F_U4.1@4017.68,972.68 4120.35,870 4648.28,870 4817.78,700.5 v1(5120.5,700.5) ; U2F.29 4718.5,463.22 4729.5,452.22 4729.5,430.5 4740,420 v1(4740,410) ; v1(4740,300) U2F.17 5070,300 5120,350 v1(5120,550)
  Bottom Layer w10: v1(4740,300) v1(4740,410) ; v1(5120,550) 5120.5,550.5 v1(5120.5,700.5)
PWM5: P1_M1.3 U2F.20 | length 2293.7
  Top Layer w10: U2F.20 5044.49,394.49 5090,440 v1(5090,580) ; v1(5090,730) 5910,730 6000,820 P1_M1.3
  Bottom Layer w10: v1(5090,580) v1(5090,730)
PWM6: P1_M2.3 U2F.21 | length 1418.7
  Top Layer w10: U2F.21 5018.44,425.98 5060,467.54 v1(5060,550) ; v1(5060,760) 5060,1640 P1_M2.3
  Bottom Layer w10: v1(5060,550) v1(5060,760)
RESET: R5F.1 U2F.35 X1F.5 | length 581.6
  Top Layer w10: R5F.1@4050,457.68 4050,410 4110,350 X1F.5 ; v1(4470,420) 4479.49,420 4485.47,425.98 U2F.35
  Bottom Layer w10: X1F.5 4205,405 4318.64,405 4333.64,420 v1(4470,420)
SCK: U2F.27
SCL: P1F.5 P5F.1 U2F.11 | length 3235.8
  Top Layer w10: P1F.5 2704.96,654.96 3465.04,654.96 3610,510 3610,290 3650,250 4180,250 v1(4190,240) ; v1(4690,240) 4828.28,240 4907.48,160.8 U2F.11 5214.59,77.56 5281.56,144.53 5355.47,144.53 P5F.1
  Bottom Layer w10: v1(4190,240) v1(4690,240)
SDA: P1F.4 P5F.2 U2F.10 | length 3352.6
  Top Layer w10: P1F.4 2524.96,674.96 3505.04,674.96 3640,540 3640,380 3670,350 4050,350 4120,280 v1(4230,280) ; v1(4650,270) 4650,238.28 4678.28,210 4820,210 4875.98,154.02 U2F.10 4875.98,48.91 4896.78,28.11 5228.11,28.11 P5F.2
  Bottom Layer w10: v1(4230,280) 4240,270 v1(4650,270)
pads on no net: H1F.0 MC1F_M1.FF1 MC1F_M1.FF2 MC1F_M1.V+_SENSE MC1F_M2.FF1 MC1F_M2.FF2 MC1F_M2.V+_SENSE MC1F_M3.FF1 MC1F_M3.FF2 MC1F_M3.V+_SENSE MC1F_M4.FF1 MC1F_M4.FF2 MC1F_M4.V+_SENSE P1_M1.2 P1_M2.2 P2F.9 P2F.10 P2F.11 P2F.12 P2F.13 P2F.14 P2F.15 P2F.16 P2F.17 P2F.18 P2F.19 P2F.20 P6F.2 P8F.2 U1F.NC U2F.3 U2F.4 U2F.5 U2F.6 U2F.7 U2F.24 U2F.32 U2F.33 U2F.36 U2F.37 U2F.40 X1F.3 X1F.4

## Polygon pours and split planes (outlines as drawn)
GND on Bottom Layer "Ground Plane" (solid, pour order 4): 0,2830 0,0 6500,0 6500,2830
24V on Bottom Layer "24V Power Plane, Bottom" (solid, pour order 2): 1210,960 1210,700 1360,700 1390,700 1390,960
24V on Top Layer "24V Power Plane, Top" (solid, pour order 0): 1210,960 1210,700 1360,700 1390,700 1390,960

## Keep-outs
Keep-Out Layer:
  the board outline again, w20

## Silkscreen, mask and mechanical layers (free items; w line width, h text height)
Top Overlay:
  drawing of 1840 lines, arcs and shapes, not listed
  text "6.50 x 2.83 inch" at 4300,2930 h180
  text "Thruster Board" at 520,990 h180 r90
  text "Sponsored By:" at 5710,370 h60
Bottom Overlay:
  text "GND" at 5480,2430 h60
  text "GND" at 6340,2430 h60
  text "GND" at 2060,1950 h60
  text "GND" at 2920,1950 h60
  text "GND" at 3790,1950 h60
  text "+" at 5177.86,1810 h60
  text "-" at 5387.86,1800 h60
  text "+" at 6017.86,1800.01 h60
  text "-" at 6232.34,1800.01 h60
  text "24V IN" at 1875,500 h60 r90
  text "12V IN" at 2075,500 h60 r90
  text "5V IN" at 2275,500 h60 r90
  text "SDA" at 2475,500 h60 r90
  text "SCL" at 2675,500 h60 r90
  text "GND" at 2875,500 h60 r90

## Text inside footprints (layer, text, board x,y; h text height)
J1_M1: Mechanical 4 "VALUE" at 6039.86,1989.53 h73.82; Mechanical 4 "NAME" at 6039.64,2440.43 h73.82; Mechanical 4 "VALUE" at 6039.86,1989.53 h73.82; Mechanical 4 "NAME" at 6039.64,2440.43 h73.82
J1_M2: Mechanical 4 "VALUE" at 5179.86,1989.53 h73.82; Mechanical 4 "NAME" at 5179.64,2440.43 h73.82; Mechanical 4 "VALUE" at 5179.86,1989.53 h73.82; Mechanical 4 "NAME" at 5179.64,2440.43 h73.82
J2_M1: Mechanical 4 "VALUE" at 6469.86,1989.53 h73.82; Mechanical 4 "NAME" at 6469.64,2440.43 h73.82; Mechanical 4 "VALUE" at 6469.86,1989.53 h73.82; Mechanical 4 "NAME" at 6469.64,2440.43 h73.82
J2_M2: Mechanical 4 "VALUE" at 5609.86,1989.53 h73.82; Mechanical 4 "NAME" at 5609.64,2440.43 h73.82; Mechanical 4 "VALUE" at 5609.86,1989.53 h73.82; Mechanical 4 "NAME" at 5609.64,2440.43 h73.82
MC1F_M1: Top Overlay "GND" at 1435,1485 h30 r270; Top Overlay "DIR" at 1535,1480 h30 r270; Top Overlay "PWM" at 1635,1485 h30 r270; Top Overlay "RESET" at 1735,1545 h30 r270; Top Overlay "FF1" at 1835,1475 h30 r270; Top Overlay "FF2" at 1935,1480 h30 r270; Top Overlay "5V" at 2035,1455 h30 r270; Top Overlay "V+" at 2135,1455 h30 r270; Top Overlay "V+" at 2080,2360 h30; Top Overlay "OUTA" at 1840,2360 h30; Top Overlay "OUTB" at 1640,2360 h30; Top Overlay "GND" at 1460,2360 h30
MC1F_M2: Top Overlay "GND" at 2310,2360 h30; Top Overlay "OUTB" at 2490,2360 h30; Top Overlay "OUTA" at 2690,2360 h30; Top Overlay "V+" at 2930,2360 h30; Top Overlay "V+" at 2985,1455 h30 r270; Top Overlay "5V" at 2885,1455 h30 r270; Top Overlay "FF2" at 2785,1480 h30 r270; Top Overlay "FF1" at 2685,1475 h30 r270; Top Overlay "RESET" at 2585,1545 h30 r270; Top Overlay "PWM" at 2485,1485 h30 r270; Top Overlay "DIR" at 2385,1480 h30 r270; Top Overlay "GND" at 2285,1485 h30 r270
MC1F_M3: Top Overlay "GND" at 3160,2360 h30; Top Overlay "OUTB" at 3340,2360 h30; Top Overlay "OUTA" at 3540,2360 h30; Top Overlay "V+" at 3780,2360 h30; Top Overlay "V+" at 3835,1455 h30 r270; Top Overlay "5V" at 3735,1455 h30 r270; Top Overlay "FF2" at 3635,1480 h30 r270; Top Overlay "FF1" at 3535,1475 h30 r270; Top Overlay "RESET" at 3435,1545 h30 r270; Top Overlay "PWM" at 3335,1485 h30 r270; Top Overlay "DIR" at 3235,1480 h30 r270; Top Overlay "GND" at 3135,1485 h30 r270
MC1F_M4: Top Overlay "GND" at 4010,2360 h30; Top Overlay "OUTB" at 4190,2360 h30; Top Overlay "OUTA" at 4390,2360 h30; Top Overlay "V+" at 4630,2360 h30; Top Overlay "V+" at 4685,1455 h30 r270; Top Overlay "5V" at 4585,1455 h30 r270; Top Overlay "FF2" at 4485,1480 h30 r270; Top Overlay "FF1" at 4385,1475 h30 r270; Top Overlay "RESET" at 4285,1545 h30 r270; Top Overlay "PWM" at 4185,1485 h30 r270; Top Overlay "DIR" at 4085,1480 h30 r270; Top Overlay "GND" at 3985,1485 h30 r270